# EAGLE board LeftSensor (EAGLE 9.1.3)
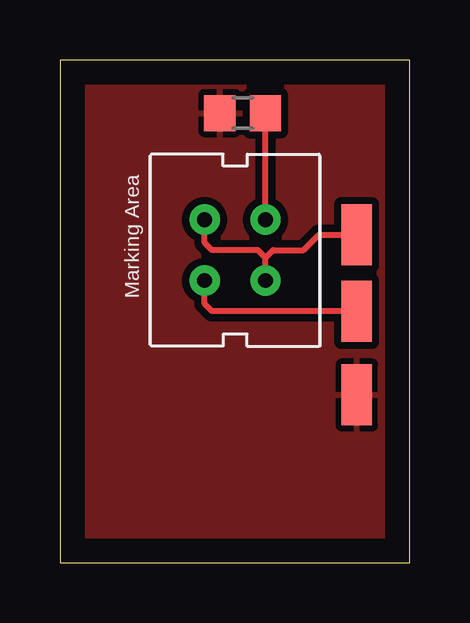
[diagram p0: board, top side]

Size 14.59 x 20.94 mm. Coordinates in mm from the lower left corner, seen from the top.
Outline: 0,0 14.59,0 14.59,20.94 0,20.94 0,0
Copper layers (1*16): Top 0.035mm / dielectric 1.5mm / Bottom 0.035mm
Design rules "default": minimum track width 6mil, minimum drill 0.35mm, track to track 6mil, track to pad 6mil, pad to pad 6mil, via to via 6mil, smd to smd 6mil, copper to edge 40mil, drill to drill 6mil, minimum pad ring 10mil, minimum via ring 8mil, stop-mask expansion 4mil, vias tented up to drill 0mil, thermal gap 10mil

## Footprints (pad centres in the part's own frame; a part is rotated, then mirrored left to right if it is on the bottom)
SMD1,27-2,54 = smd 1.27 x 2.54: 1 0,0
RCL_R0805 = smd 1.3 x 1.5: 1 -0.95,0; 2 0.95,0
4 = drill 0.61 pad 1.27: A -1.27,1.27; C 1.27,-1.27; E 1.27,1.27; K -1.27,-1.27

## Placement (x,y rotation side)
PAD1  WIREPADSMD1,27-254  [SMD1,27-2,54]  12.38,13.65 0 top
PAD2  WIREPADSMD1,27-254  [SMD1,27-2,54]  12.38,10.48 0 top
PAD3  WIREPADSMD1,27-254  [SMD1,27-2,54]  12.38,6.99 0 top
R1  [RCL_R0805]  7.62,18.73 0 top
X2  CNY70  [4]  7.3,13.02 180 top

## Library data of the parts
PAD1-PAD3 = wirepad
R1 = ScyllAlarmV3.0
X2 = cny70

## Nets
GND: PAD3.1 R1.1
N$1: R1.2 X2.K
SENSOR: PAD2.1 X2.E
VCC: PAD1.1 X2.A X2.C

## Tracks (layer width: path | path; a pad name or v marks a point on that pad's centre or on a via)
GND
  pour Top (isolate 0.305): 0,20.95 14.61,20.95 14.61,0 0,0
N$1
  Top 0.254: X2.K R1.2
SENSOR
  Top 0.254: PAD2.1 6.35,10.48 6.03,10.79 X2.E
VCC
  Top 0.254: X2.A 8.57,12.7 | 8.57,12.7 8.26,13.02 6.35,13.02 6.03,13.34 X2.C | 8.57,12.7 | 8.57,12.7 8.89,13.02 10.16,13.02 10.79,13.65 PAD1.1